# Altium PCB temperture.PcbDoc (part 2 of 2)
Units mil, origin at the board's own origin, x right, y up, seen from the top; angles counter-clockwise.
Board outline 9600 x 6010 mil, 2 copper layers (Top Layer, Bottom Layer); 151 components, 110 nets, 697 pads, 117 vias.
Unrouted connection lines stored in the file: 3.
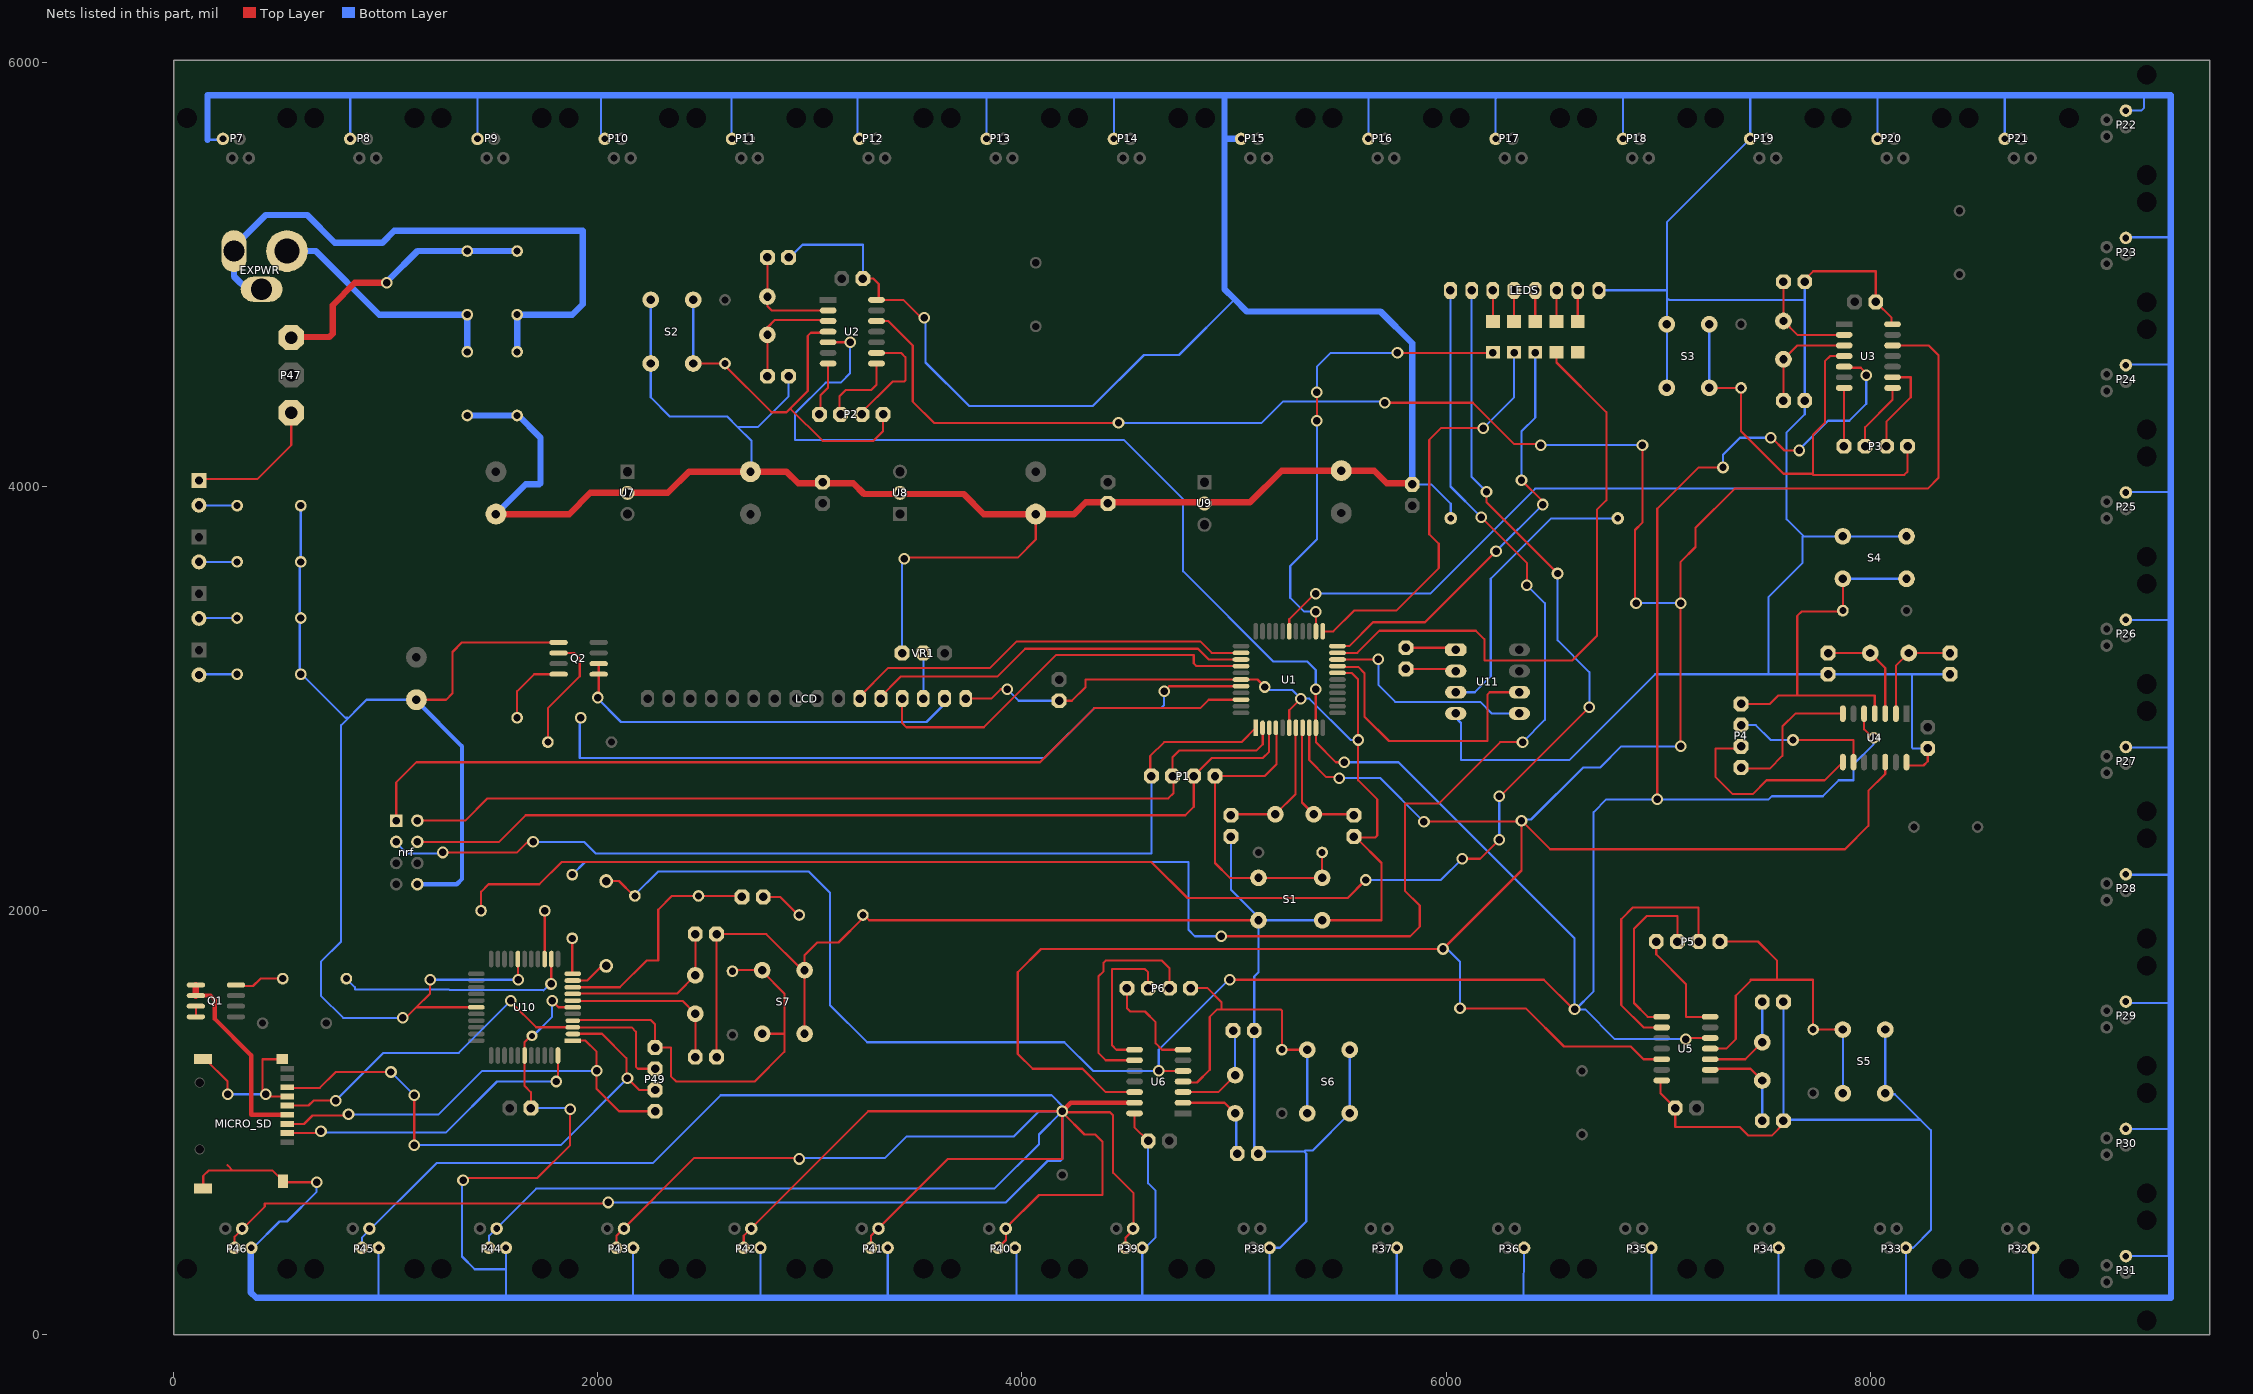
[diagram p2: the nets of this part, all layers, seen from the top]

## Via types
v1: diameter 55, hole 35, Top Layer to Bottom Layer, 116 vias
v2: diameter 50, hole 28, Top Layer to Bottom Layer, 1 vias

## Nets (pads, with @x,y where several pads share a name; then routed paths per layer and width w, separated by ;. In a path a pad name is that pad's centre, name@x,y a point inside that pad or via, vN(x,y) a via of type N, cw(c..) or ccw(c..) an arc to the next point about the centre after c; other vN are vias at no path point) (continued)
DATA5: P39.2 P39.3 P40.2 P40.3 P41.2 P41.3 P42.2 P42.3 P43.2 P43.3 P44.2 P44.3 P45.2 P45.3 P46.2 P46.3 R5.1 U6.13 | length 18916.4
  Top Layer w10: P46.2@288.19,411.06 288.19,463.19 430,605 430,620 v1@2050,620 ; P43.2@2088.19,411.06 2088.19,468.19 2455,835 v1@2925,835 ; P42.2@2688.19,411.06 2688.19,468.19 3275,1055 R5.1@4190,1055 ; P41.2@3288.19,411.06 3288.19,468.19 3650,830 4190,830 4190,1040 R5.1@4185,1045 ; P40.2@3888.19,411.06 3925,447.87 3925,505 4080,660 4380,660 4380,910 4345,945 4295,945 R5.1@4195,1045 ; R5.1@4185,1050 4415,1050 4430,1035 4430,765 4525,670 4525,495 4488.19,458.19 P39.2@4488.19,411.06
  Top Layer w20: R5.1@4190,1055 4230,1095 U6.13@4525,1095
  Bottom Layer w10: P45.2@888.19,411.06 888.19,458.19 1240,810 2260,810 2580,1130 4140,1130 4195,1075 R5.1@4195,1065 ; P44.2@1488.19,411.06 1488.19,468.19 1710,690 3870,690 4080,900 4080,945 R5.1@4190,1055 ; v1@2055,625 3925,625 4120,820 4180,820 4190,830 R5.1@4190,1055 ; v1@2965,835 3355,835 3455,935 3960,935 4080,1055 R5.1@4190,1055
  other v1: 2050,625 2950,830
E: LCD.6 U1.35 | length 1927.7
  Top Layer w10: LCD.6@3235,3010 3370,3145 3850,3145 3975,3270 4840,3270 4894.02,3215.98 U1.35@5032.64,3215.98
GND: battry.2 C1.2 C2.2 C3.2 C4.2 C5.2 C9.2 C10.2 C11.2 C12.2 C13.2 C14.2 C15.2 C16.2 C17.2 C18.2 C19.2 C20.2 C21.2 C22.2 C23.2 C24.2 C25.2 C26.2 C27.2 C28.2 C29.2 C30.2 C31.2 C32.2 DR1.1 DR2.1 LCD.1 LEDS.8 MICRO_SD.6 MICRO_SD.sh1 MICRO_SD.sh2 MICRO_SD.sh3 MICRO_SD.sh4 nrf.8 P7.4 P8.4 P9.4 P10.4 P11.4 P12.4 P13.4 P14.4 P15.4 P16.4 P17.4 P18.4 P19.4 P20.4 P21.4 P22.4 P23.4 P24.4 P25.4 P26.4 P27.4 P28.4 P29.4 P30.4 P31.4 P32.4 P33.4 P34.4 P35.4 P36.4 P37.4 P38.4 P39.4 P40.4 P41.4 P42.4 P43.4 P44.4 P45.4 P46.4 Q2.1 R7.2 R15.1 R16.1 R17.1 R18.1 S1.1 S2.2 S3.2 S4.2 S5.2 S6.1 S7.2 U1.6 U1.18 U1.28 U1.39 U2.14 U3.14 U4.14 U5.14 U6.14 U7.3 U8.3 U9.2 U10.6 U10.18 U10.28 U10.39 U11.4 VR1.1 | length 82982.3
  Top Layer w10: MICRO_SD.sh2@139.06,1300.12 149.88,1300.12 255,1195 v1(255,1135) ; MICRO_SD.sh3@140,695 140,750 165,775 280,775 ; 255,800 280,775 ; MICRO_SD.sh1@513.07,1300.12 420.12,1300.12 420.12,1154.88 450,1125 MICRO_SD.6@535,1125 ; MICRO_SD.sh4@517.01,725.31 467.32,775 280,775 ; MICRO_SD.sh4@520,725 525,720 v1(675,720) ; v1@1095,1495 1145,1545 ; C5.2@1145,2995 1285,2995 1315,3025 1315,3220 1360,3265 Q2.1@1815.51,3265 ; v1(1210,1675) 1210,1610 1145,1545 ; v1@1380,740 1715,740 1870,895 v1(1870,1065) ; U10.28@1427.64,1545 1145,1545 ; U10.18@1623.5,1772.36 1623.5,1691.5 v1@1625,1690 ; C26.2@1685,1065 C26.2@1685,1070 1685,1145 1655,1175 U10.39@1655,1317.64 1655,1380 v2@1685,1410 ; v1@1795,1565 1815,1545 U10.6@1882.36,1545 ; C25.2@2555,1305 C25.2@2560,1310 C24.2@2560,1890 2795,1890 2965,1720 S7.2@2970,1720 ; S7.2@2980,1415 S7.2@2975,1420 S7.2@2975,1720 2975,1790 3035,1850 3135,1850 R7.2@3250,1965 ; R7.2@3250,1985 3280,1955 S1.1@5115,1955 ; C31.2@3250,4980 3300,4980 3325,4955 U2.14@3325,4885 ; U2.14@3314.17,4880 3440,4880 3515,4805 v1@3535,4805 ; v1@3455,3665 3980,3665 4065,3750 C3.2@4065,3870 ; LCD.1@3730,3000 LCD.1@3735,3000 3855,3000 3900,3045 v1(3930,3045) ; C32.2@4175,2990 4235,2990 4300,3055 4300,3090 U1.39@5032.64,3090 5110,3090 v1(5145,3055) ; U6.14@4530,1045 4530,980 C27.2@4595,915 ; U1.6@5260,2862.64 5260,2945 v1(5315,3000) ; U1.28@5260,3317.36 5260,3375 v1@5380,3495 ; S1.1@5415,1955 5695,1955 5695,2225 C13.2@5580,2340 ; U1.18@5487.36,3121.5 5553.5,3121.5 5585,3090 v1(5585,2805) 5585,2620 ; C13.2@5570,2345 5665,2345 5675,2355 5675,2525 5585,2615 ; U5.14@7010,1190 7010,1140 C30.2@7080,1070 7080,980 7385,980 7425,940 7535,940 C20.2@7595,1000 ; C16.2@7685,4970 7730,5015 8025,5015 C28.2@8025,4870 8100,4795 U3.14@8100,4765 ; U4.14@8170,2685 8250,2685 8270,2705 C29.2@8270,2765
  Top Layer w30: C1.2@1520,3870 1865,3870 1965,3970 2330,3970 2430,4070 C2.2@2720,4070 2890,4070 2945,4015 3205,4015 3255,3965 3725,3965 3820,3870 C3.2@4065,3870 4245,3870 4300,3925 5075,3925 5225,4075 C4.2@5505,4075 5660,4075 5720,4015 C9.2@5840,4015
  Bottom Layer w10: 160,5635 P7.4@230,5635 ; v1(255,1135) v1(435,1135) ; P46.4@366.93,411.06 376.06,411.06 500,535 535,535 675,675 v1@675,715 ; R18.1@600,3910 600,3650 595,3645 595,3125 810,2910 820,2910 ; P8.4@833.07,5638.94 833.07,5838.07 835,5840 ; 966.93,175 P45.4@966.93,411.06 ; v1@1065,1495 800,1495 695,1600 695,1760 790,1855 790,2875 910,2995 C5.2@1145,2995 ; v1@1215,1675 v1(1625,1675) ; v1@1360,725 1360,370 1420,310 1566.93,310 ; P9.4@1433.07,5638.94 1433.07,5845 ; P44.4@1566.93,411.06 1566.93,310 ; 1568.86,175 1566.93,176.93 1566.93,310 ; DR2.1@1615,4335 DR2.1@1620,4340 ; C26.2@1685,1070 1865,1070 v1(1870,1065) ; v2@1690,1405 1785,1500 v1(1785,1575) ; 2015,5835 2015,5657.01 P10.4@2033.07,5638.94 ; 2166.93,178.07 P43.4@2166.93,411.06 ; S2.2@2250,4880 S2.2@2250,4580 2250,4420 2340,4330 2610,4330 2660,4280 ; 2630,5840 2630,5642.01 P11.4@2633.07,5638.94 ; C2.2@2725,4070 2725,4215 2660,4280 ; 2766.93,175 2766.93,178.07 ; P42.4@2766.93,411.06 2766.93,178.07 ; 2770,175 2766.93,178.07 ; C15.2@2900,4520 2900,4425 2755,4280 2660,4280 ; C14.2@2905,5080 2965,5140 3250,5140 C31.2@3250,4980 ; 3225,5840 3225,5647.01 P12.4@3233.07,5638.94 ; P41.4@3366.93,411.06 3366.93,178.07 3370,175 ; VR1.1@3435,3215 v1@3435,3660 ; v1@3545,4775 3545,4585 3750,4380 4335,4380 4575,4620 4740,4620 5002.5,4882.5 ; 3830,5845 3833.07,5841.93 P13.4@3833.07,5638.94 ; v1@3935,3040 3985,2990 C32.2@4175,2990 ; P40.4@3965,410 3975,400 3975,175 ; P14.4@4433.07,5638.94 4433.07,5845 ; 4565,175 4566.93,176.93 P39.4@4566.93,411.06 4581.06,411.06 4630,460 4630,680 4595,715 C27.2@4595,915 ; 4950,5850 4955,5845 ; C12.2@4985,2350 4985,2100 S1.1@5120,1965 ; C22.2@5107.5,862.5 5095,875 C23.2@5095,1435 5095,1690 5115,1710 S1.1@5115,1955 S1.1@5415,1955 ; C22.2@5110,865 5330,865 5340,855 5340,535 5216.06,411.06 P38.4@5166.93,411.06 5166.93,176.93 5165,175 ; v1(5145,3055) 5160,3040 5275,3040 v1(5315,3000) 5355,3000 5550,2805 v1(5585,2805) ; 5335,870 5370,870 S6.1@5545,1045 ; v1@5390,3495 5925,3495 6420,3990 7605,3990 ; S6.1@5540,1050 5545,1055 S6.1@5545,1345 ; P16.4@5633.07,5638.94 5633.07,5828.07 5650,5845 ; 5765,175 5766.93,176.93 P37.4@5766.93,411.06 ; C9.2@5845,4010 5930,4010 6021.3,3918.7 battry.2@6021.3,3850 ; U11.4@6040,2915 6070,2885 6070,2710 6580,2710 6985,3115 7520,3115 ; P17.4@6233.07,5638.94 6233.07,5828.07 6245,5840 ; 6365,175 P36.4@6366.93,411.06 ; LEDS.8@6720,4925 7040,4925 ; P18.4@6833.07,5638.94 6833.07,5833.07 6845,5845 ; 6965,175 6966.93,176.93 P35.4@6966.93,411.06 ; S3.2@7035,4455 7040,4460 S3.2@7040,4465 S3.2@7040,4765 7040,4890 ; 7435,5855 7433.07,5853.07 7433.07,5845 P19.4@7433.07,5638.94 7040,5245.87 7040,4925 ; 7565,175 7566.93,176.93 P34.4@7566.93,411.06 ; C20.2@7590,1015 C21.2@7590,1570 ; C20.2@7597.5,1017.5 7600,1015 8235,1015 ; 7680,3765 7680,3640 7520,3480 7520,3115 ; C16.2@7690,4965 7690,4880 ; 8015,5850 8020,5845 8033.07,5831.93 P20.4@8033.07,5638.94 ; S5.2@8070,1440 S5.2@8070,1140 8075,1135 8115,1135 8235,1015 ; S4.2@8160,3770 8155,3765 S4.2@7870,3765 7685,3765 7605,3845 7605,3990 ; 8165,175 8166.93,176.93 P33.4@8166.93,411.06 8201.06,411.06 8285,495 8285,965 8235,1015 ; C29.2@8270,2765 8200,2765 8195,2770 8195,3115 ; C18.2@8375,3105 C18.2@8385,3095 ; C18.2@8375,3115 8195,3115 ; P21.4@8633.07,5638.94 8633.07,5845 8633.07,5848.07 8635,5850 ; P32.4@8765,405 8766.93,403.07 8766.93,175 ; P27.4@9200,2770 9415,2770 ; P31.4@9203.94,371.93 9416.93,371.93 ; P30.4@9203.94,971.93 9415,971.93 ; P23.4@9203.94,5171.93 9207.01,5175 9415,5175 ; P22.4@9203.94,5771.93 9276.93,5771.93 9290,5785 9290,5845 ; P26.4@9205,3375 9210,3370 9415,3370 ; P24.4@9205,4570 9210,4575 9415,4575 ; P29.4@9210,1575 9220,1565 9415,1565 ; P25.4@9210,3975 9411.14,3975 ; P28.4@9215,2170 9415,2170 ; 7040,4890 7040,4925 ; 7040,4890 7050,4880 7690,4880 ; 7520,3115 C19.2@7800,3115 8195,3115 ; 7605,3990 7605,4255 7690,4340 C17.2@7690,4405 7690,4880
  Bottom Layer w20: C5.2@1145,2990 1360,2775 1360,2150 1335,2125 nrf.8@1150,2125
  Bottom Layer w30: 160,5635 160,5845 1433.07,5845 3830,5845 4433.07,5845 4955,5845 ; P46.4@365,410 365,200 390,175 966.93,175 1568.86,175 2766.93,175 ; DR1.1@1385,4335 DR2.1@1615,4335 ; C1.2@1520,3870 1660,4010 1725,4010 ; DR2.1@1620,4340 1730,4230 1730,4015 ; 2770,175 3370,175 3975,175 4565,175 5165,175 5765,175 6365,175 6965,175 7565,175 8165,175 8766.93,175 9416.93,175 9416.93,371.93 ; P15.4@5030,5640 4955,5640 ; C9.2@5840,4010 5840,4675 5690,4825 5060,4825 5002.5,4882.5 4955,4930 4955,5640 ; 8015,5845 7433.07,5845 5650,5845 4955,5845 ; 8020,5845 8633.07,5845 9290,5845 9415,5845 9415,5175 9415,4575 ; 9415,375 9415,971.93 9415,1565 9415,2170 9415,2770 9415,3370 9415,4571.93 ; 4955,5640 4955,5845
  other v1: 1365,730 1080,1495 5385,3495 3445,3660 3540,4795
  other v2: 1690,1410
IN1: DR1.2 DR4.1 EXPWR.1 | length 1161.3
  Bottom Layer w10: DR1.2@1380,4645 DR1.2@1385,4650
  Bottom Layer w30: EXPWR.1@515,5110 670,5110 970,4810 DR4.1@1385,4810 DR1.2@1385,4650
IN2: DR2.2 DR3.1 EXPWR.2 EXPWR.3 | length 2909.3
  Bottom Layer w10: EXPWR.2@285,5060 EXPWR.2@285,5110 ; EXPWR.2@290,5130 EXPWR.2@290,5135 ; EXPWR.3@350,4925 EXPWR.3@415,4925
  Bottom Layer w30: EXPWR.2@285,5060 285,4990 EXPWR.3@350,4925 ; EXPWR.2@290,5135 435,5280 630,5280 760,5150 985,5150 1040,5205 1930,5205 1930,4860 1880,4810 DR3.1@1620,4810 DR2.2@1620,4635
IRQ_S: nrf.1 U1.42 | length 4311.5
  Top Layer w10: nrf.1@1050,2425 1050,2605 1145,2700 4085,2700 4340,2955 4840,2955 4880,2995 U1.42@5020,2995
LCD_POW: R581.1 U1.40 | length 3490.1
  Top Layer w10: v1(4670,3035) 4693.5,3058.5 U1.40@5032.64,3058.5
  Bottom Layer w10: R581.1@1925,2910 1915,2900 1915,2720 4105,2720 4340,2955 4655,2955 4670,2970 v1(4670,3035)
LD_1: R50.1 U10.11 | length 167.1
  Top Layer w10: R50.1@1880,1870 1880,1710 U10.11@1885,1705
LD_2: R51.1 U10.14 | length 215
  Top Layer w10: U10.14@1750,1785 R51.1@1750,2000
LD_3: R513.1 U1.21 | length 2878.4
  Top Layer w10: U1.21@5487.36,3215.98 5580.98,3215.98 5685,3320 6140,3320 6180,3280 6180,3185 ; 6180,3180 6595,3180 6710,3295 6710,3890 6755,3935 6755,4350 6520,4585 R513.1@6520,4632.5
LD_4: R512.1 U1.22 | length 2030.4
  Top Layer w10: U1.22@5487.36,3247.48 5542.48,3247.48 5655,3360 5900,3360 v1(6235,3695) ; v1(6355,4030) 6455,3930 v1(6455,3915)
  Bottom Layer w10: v1(6235,3695) 6450,3910 v1@6450,3915 ; v1(6355,4030) 6355,4260 6420,4325 v1@6420,4635
  other v1: 6420,4630
LD_5: R511.1 U1.23 | length 1980.2
  Top Layer w10: U1.23@5417.48,3317.36 5467.36,3317.36 5565,3415 5765,3415 5965,3615 5965,3730 5920,3775 5920,4220 5975,4275 v1(6175,4275)
  Bottom Layer w10: v1@6180,4280 6320,4420 v1(6320,4630)
LD_6: R510.1 U1.24 | length 2218.7
  Top Layer w10: v1@5385,3400 5385.98,3399.02 U1.24@5385.98,3317.36 ; v1(5390,4310) v1(5390,4445) ; v1(5770,4630) R510.1@6210,4630
  Bottom Layer w10: v1(5385,3410) 5330,3410 5265,3475 5265,3625 5390,3750 v1(5390,4310) ; v1(5390,4445) 5390,4565 5455,4630 v1(5770,4630)
  other v1: 6220,4630
LD_7: R514.1
LP: LCD.2 Q2.5 Q2.6 | length 1920.3
  Top Layer w10: v1(2000,3005) 2004.49,3009.49 Q2.5@2004.49,3115 Q2.6@2004.49,3164.49 ; v1@2002.5,3002.5 v1@2004.49,3004.49 ; Q2.6@2004.49,3165 Q2.6@2004.49,3164.49 ; Q2.6@2005,3165 Q2.6@2004.49,3164.49
  Bottom Layer w10: v1@1990,3010 2110,2890 3550,2890 3635,2975 LCD.2@3635,3000
MISO1: nrf.2 P1.2 U1.2 | length 4293.7
  Top Layer w10: nrf.2@1150,2425 1375,2425 1480,2530 4690,2530 4715,2555 P1.2@4715,2635 ; P1.2@4710,2635 4710,2725 4740,2755 5105,2755 5135,2785 U1.2@5135,2840
MISO2: P2.2 U2.8 | length 372.4
  Top Layer w10: P2.2@3140,4350 3140,4425 3170,4455 3290,4455 3314.17,4479.17 U2.8@3314.17,4580
MISO3: P3.2 U3.8 | length 328.5
  Top Layer w10: P3.2@7975,4190 7975,4280 8104.17,4409.17 U3.8@8104.17,4465
MISO4: P4.2 U4.8 | length 944.8
  Top Layer w10: P4.2@7380,2775 7370,2765 7270,2765 7270,2630 7350,2550 7445,2550 7510,2615 7784.17,2615 U4.8@7870,2700.83
MISO5: P5.2 U5.8 | length 861.8
  Top Layer w10: U5.8@7020,1500 U5.8@7015.83,1500 6950,1500 6885,1565 6885,1915 6945,1975 7090,1975 P5.2@7090,1855
MISO6: P6.2 U6.8 | length 724.5
  Top Layer w10: U6.8@4530,1345 4445,1345 4425,1365 4425,1725 4580,1725 4595,1710 P6.2@4595,1635
MISO7: MICRO_SD.7 P49.2 U10.2 | length 2546.3
  Top Layer w10: MICRO_SD.7@535,1165 690,1165 765,1240 v1(1025,1240) ; v1(1135,895) v1(1135,1130) ; U10.2@1885,1420 2020,1420 2135,1305 v1@2135,1215 ; v1(2140,1210) 2195,1155 P49.2@2270,1155
  Bottom Layer w10: v1@1040,1225 v1(1135,1130) ; v1@1155,895 1825,895 v1(2140,1210)
MOSI1: nrf.3 P1.1 U1.1 | length 4601.7
  Top Layer w10: v1(1270,2275) 1620,2275 1670,2325 v1(1695,2325) ; P1.1@4605,2640 4605,2730 4670,2795 5034.88,2795 U1.1@5102.52,2862.64
  Bottom Layer w10: nrf.3@1050,2325 1050,2320 1100,2270 v1@1250,2270 ; v1@1710,2325 1935,2325 1990,2270 4610,2270 P1.1@4610,2635
MOSI2: P2.1 U2.7 | length 249.8
  Top Layer w10: P2.1@3050,4345 3050,4430 3085.83,4465.83 U2.7@3085.83,4580
MOSI3: P3.1 U3.7 | length 280.3
  Top Layer w10: P3.1@7875,4185 P3.1@7875,4190 7875,4464.17 U3.7@7875.83,4465
MOSI4: P4.1 U4.7 | length 663.4
  Top Layer w10: P4.1@7395,2670 7525,2670 7585,2730 7585,2868.35 7645.83,2929.17 U4.7@7870,2929.17
MOSI5: P5.1 U5.7 | length 522.2
  Top Layer w10: P5.1@6990,1850 6990,1795 7130,1655 7130,1500 U5.7@7244.17,1500
MOSI6: P6.1 U6.7 | length 488.5
  Top Layer w10: P6.1@4495,1625 4495,1540 4510,1525 4580,1525 4630,1475 4630,1375 4660,1345 U6.7@4759.17,1345
MOSI7: MICRO_SD.3 P49.1 U10.1 | length 2182.7
  Top Layer w10: MICRO_SD.3@536.69,995 615,995 655,1035 v1@810,1035 ; U10.1@1882.36,1387.52 1942.48,1387.52 1995,1335 v1(1995,1245) 1995,1160 2100,1055 P49.1@2270,1055 P49.1@2275,1055
  Bottom Layer w10: v1(825,1040) 1250,1040 1455,1245 v1(1995,1245) v1@2000,1245
NCS: MICRO_SD.2 U10.44 | length 1464.2
  Top Layer w10: MICRO_SD.2@536.69,951.69 681.69,951.69 v1@685,955 ; v1@1812.48,1212.52 U10.44@1812.48,1317.64
  Bottom Layer w10: v1@695,955 1285,955 1525,1195 v1(1805,1195)
  other v1: 695,960
NetC12_1: C12.1 U1.7 Y1.2 | length 641.3
  Top Layer w10: C12.1@4985,2450 4990,2455 Y1.2@5194.72,2455 5290,2550.28 U1.7@5290,2845
NetC13_1: C13.1 U1.8 Y1.1 | length 626.8
  Top Layer w10: U1.8@5320,2860 5320,2510.28 Y1.1@5375.28,2455 C13.1@5555,2455 ; C13.1@5560,2460 C13.1@5555,2455 ; C13.1@5565,2460 5560,2455 C13.1@5555,2455
NetC14_1: C14.1 U2.2 Y2.2 | length 520.4
  Top Layer w10: Y2.2@2800,4890 2800,4850 2820,4830 U2.2@3080,4830 ; C14.1@2800,5080 2800,4910 2805,4905 Y2.2@2805,4890
NetC15_1: C15.1 U2.3 Y2.1 | length 531.6
  Top Layer w10: C15.1@2800,4520 2800,4710 Y2.1@2805,4715 ; Y2.1@2800,4715 2800,4750 2835,4785 U2.3@3085,4785
NetC16_1: C16.1 U3.2 Y3.2 | length 494.1
  Top Layer w10: Y3.2@7585,4785 7590,4790 C16.1@7590,4965 ; Y3.2@7590,4780.28 7655.28,4715 U3.2@7875,4715
NetC17_1: C17.1 U3.3 Y3.1 | length 507
  Top Layer w10: C17.1@7590,4405 Y3.1@7590,4595 ; Y3.1@7590,4599.72 7655.28,4665 U3.3@7875.83,4665 U3.3@7880,4665
NetC18_1: C18.1 U4.2 Y4.2 | length 498.3
  Top Layer w10: U4.2@8120,2935 8120,3154.72 Y4.2@8177.64,3212.36 ; Y4.2@8180,3210 8185,3215 C18.1@8375,3215
NetC19_1: C19.1 U4.3 Y4.1 | length 516.2
  Top Layer w10: C19.1@7800,3215 Y4.1@7999.72,3215 ; Y4.1@7995,3210 8000,3215 Y4.1@7999.72,3215 ; U4.3@8070,2935 8070,3144.72 7999.86,3214.86 Y4.1@7999.72,3215
NetC20_1: C20.1 U5.2 Y5.2 | length 446.2
  Top Layer w10: U5.2@7260,1255 7434.72,1255 Y5.2@7490,1199.72 ; C20.1@7487.5,1012.5 C20.1@7490,1015
  Bottom Layer w10: C20.1@7490,1010 Y5.2@7490,1199.72
NetC21_1: C21.1 U5.3 Y5.1 | length 463.7
  Top Layer w10: U5.3@7255,1300 7409.72,1300 Y5.1@7487.36,1377.64 ; Y5.1@7485,1380 Y5.1@7490,1385
  Bottom Layer w10: C21.1@7490,1570 7490,1385 Y5.1@7495,1380
NetC22_1: C22.1 U6.2 Y6.2 | length 449.7
  Top Layer w10: U6.2@4770,1095 4954.72,1095 Y6.2@5005,1044.72 ; C22.1@5005,860 C22.1@5010,855
  Bottom Layer w10: Y6.2@5005,1044.72 5010,1039.72 C22.1@5010,860
NetC23_1: C23.1 U6.3 Y6.1 | length 496.3
  Top Layer w10: U6.3@4760,1145 4924.72,1145 Y6.1@5005,1225.28 ; C23.1@5000,1430 C23.1@5005,1425
  Bottom Layer w10: C23.1@4990,1430 5005,1415 Y6.1@5005,1225.28
NetC24_1: C24.1 U10.8 Y8.1 | length 800
  Top Layer w10: U10.8@1890,1610 2374.72,1610 Y8.1@2460,1695.28 C24.1@2460,1890
NetC25_1: C25.1 U10.7 Y8.2 | length 793.8
  Top Layer w10: U10.7@1895,1580 1900,1575 2399.72,1575 Y8.2@2460,1514.72 2460,1320 C25.1@2465,1315
NetD1_2: D1.2 R15.2 | length 180
  Bottom Layer w10: D1.2@120,3645 R15.2@300,3645
NetD2_2: D2.2 R16.2 | length 170
  Bottom Layer w10: D2.2@130,3380 R16.2@300,3380
NetD3_2: D3.2 R17.2 | length 177.1
  Bottom Layer w10: D3.2@125,3110 130,3115 R17.2@300,3115
NetD4_2: D4.2 R18.2 | length 180
  Bottom Layer w10: D4.2@120,3910 R18.2@300,3910
NetD5_1: D5.1 U10.10 | length 179.2
  Top Layer w10: U10.10@1882.36,1670.98 1950.98,1670.98 2015,1735 D5.1@2035,1735
NetDR3_2: DR3.2 DR4.2 P47.1 | length 1302.7
  Top Layer w10: v1(1005,4960) 1005,4955 v1@1010,4960
  Top Layer w30: P47.1@565,4705 735,4705 750,4720 750,4855 855,4960 v1@1010,4960
  Bottom Layer w30: v1@1015,4975 1150,5110 DR4.2@1385,5110 DR3.2@1620,5110
NetLCD_3: LCD.3 VR1.2 | length 215
  Bottom Layer w10: LCD.3@3535,3000 VR1.2@3535,3215
NetLEDS_1: LEDS.1 R50.2 | length 8002.9
  Top Layer w10: v1(4940,1880) 5830,1880 5875,1925 5875,2025 5805,2095 5805,2505 5965,2505 6255,2795 v1(6360,2795) ; v1(6165,3855) 6380,3640 v1@6380,3545
  Bottom Layer w10: R50.2@1880,2170 1940,2230 4785,2230 4785,1910 4815,1880 v1(4940,1880) ; LEDS.1@6020,4925 6020,4000 v1(6165,3855) ; v1(6360,2795) 6465,2900 6465,3450 v1(6380,3535)
NetLEDS_2: LEDS.2 R51.2 | length 8124.1
  Top Layer w10: R51.2@1450,2000 1450,2090 1485,2125 1725,2125 1830,2230 4610,2230 4780,2060 5535,2060 v1@5615,2140 ; v1(6075,2245) 6160,2245 v1(6250,2335) ; v1(6190,3975) 6190,3925 v1(6525,3590) ; v1(6250,2540) 6255,2540 v1(6675,2960)
  Bottom Layer w10: v1(5620,2145) 5975,2145 v1(6075,2245) ; LEDS.2@6120,4925 6120,4045 v1(6190,3975) ; v1(6250,2335) v1(6250,2540) ; v1(6525,3590) 6525,3275 6675,3125 v1(6675,2960)
NetLEDS_3: LEDS.3 R510.2 | length 150
  Top Layer w10: R510.2@6220,4775 R510.2@6220,4777.5 LEDS.3@6220,4925
NetLEDS_4: LEDS.4 R511.2 | length 145
  Top Layer w10: R511.2@6320,4780 LEDS.4@6320,4925
NetLEDS_5: LEDS.5 R512.2 | length 147.1
  Top Layer w10: R512.2@6415,4780 6420,4785 LEDS.5@6420,4925
NetLEDS_6: LEDS.6 R513.2 | length 140
  Top Layer w10: R513.2@6520,4785 LEDS.6@6520,4925
NetLEDS_7: LEDS.7 R514.2 | length 147.1
  Top Layer w10: R514.2@6615,4780 6620,4785 LEDS.7@6620,4925
NetQ1_4: Q1.4 R58.2 | length 229.5
  Top Layer w10: Q1.4@300,1645 375,1645 410,1680 R58.2@515,1680
NetQ1_7: Q1.7 Q1.8 | length 50.2
  Top Layer w10: Q1.8@105,1500 105.51,1500.51 Q1.7@105.51,1550
NetQ2_2: Q2.2 R580.2 | length 577.5
  Top Layer w10: R580.2@1765,2785 1765,2955 1915,3105 1915,3190 1890,3215 Q2.2@1815.51,3215 Q2.2@1815,3215
NetQ2_4: Q2.4 R581.2 | length 348.1
  Top Layer w10: R581.2@1620,2910 1620,3035 1700,3115 Q2.4@1810,3115
NetR7_1: R7.1 W5.1 | length 193.1
  Top Layer w10: W5.1@2780,2065 2860,2065 R7.1@2940,1985
NetU11_1: U11.1 Y7.1 | length 244.1
  Top Layer w10: Y7.1@5810,3240 6040,3240 U11.1@6050,3230
NetU11_2: U11.2 Y7.2 | length 247.1
  Top Layer w10: Y7.2@5810,3140 6050,3140 U11.2@6055,3135
RS: LCD.4 U1.37 | length 1901.2
  Top Layer w10: LCD.4@3435,2995 3435,2885 3455,2865 3820,2865 4160,3205 4810,3205 4810,3165.98 4822.99,3152.99 U1.37@5032.64,3152.99
RST1: P1.4 R14.2 S1.2 U1.4 | length 1538.8
  Top Layer w10: P1.4@4910,2630 4910,2225 4980,2155 S1.2@5115,2155 S1.2@5415,2155 5415,2270 R14.2@5420,2275 ; P1.4@4910,2635 5145,2635 5200,2690 U1.4@5200,2855
RST2: P2.4 R13.1 S2.1 U2.4 | length 1945.7
  Top Layer w10: S2.1@2450,4580 2590,4580 2820,4350 2890,4350 2990,4450 2990,4710 3005,4725 U2.4@3095,4725 ; 2910,4365 3060,4215 3300,4215 3345,4260 P2.4@3345,4340
  Bottom Layer w10: S2.1@2445,4580 2450,4585 S2.1@2450,4880
RST3: P3.4 R12.1 S3.1 U3.4 | length 2297.2
  Top Layer w10: S3.1@7240,4465 R12.1@7390,4465 7390,4260 7590,4060 7725,4060 ; U3.4@7870,4615 7810,4615 7785,4590 7785,4300 7730,4245 7730,4055 8160,4055 8175,4070 P3.4@8175,4190
  Bottom Layer w10: S3.1@7240,4465 S3.1@7240,4765
RST4: P4.4 R11.1 S4.1 U4.4 | length 1786.9
  Top Layer w10: P4.4@7390,2975 7525,2975 7565,3015 8020,3015 U4.4@8020,2929.17 ; 7655,3020 7655,3390 7675,3410 7865,3410 R11.1@7870,3415 S4.1@7870,3565
  Bottom Layer w10: S4.1@7865,3555 7875,3565 S4.1@8170,3565
RST5: P5.4 R10.1 S5.1 U5.4 | length 1812
  Top Layer w10: U5.4@7244.17,1350 7320,1350 7365,1395 7365,1600 7440,1675 ; P5.4@7290,1855 7470,1855 7560,1765 7560,1675 ; 7435,1675 7440,1675 ; S5.1@7870,1440 7735,1440 7730,1445 7730,1675 7560,1675 ; 7440,1675 7560,1675
  Bottom Layer w10: S5.1@7870,1440 7870,1150 S5.1@7875,1145
RST6: P6.4 R9.1 S6.2 U6.4 | length 1563.3
  Top Layer w10: U6.4@4760,1190 4825,1190 4885,1250 4885,1500 4920,1535 4940,1535 ; P6.4@4795,1635 4875,1635 4940,1570 4940,1535 ; S6.2@5345,1345 R9.1@5225,1345 5225,1530 5220,1535 4940,1535
  Bottom Layer w10: S6.2@5345,1050 S6.2@5345,1345
RST7: P49.4 R8.2 S7.1 U10.4 | length 1985.1
  Top Layer w10: U10.4@1885,1485 2250,1485 2270,1465 P49.4@2270,1355 2345,1355 2345,1220 2370,1195 2740,1195 2880,1335 2880,1610 S7.1@2775,1715 ; R8.2@2635,1720 S7.1@2775,1720 ; S7.1@2775,1420 2880,1420
RW: LCD.5 U1.36 | length 1825.9
  Top Layer w10: LCD.5@3325,3000 3430,3105 3885,3105 4015,3235 4830,3235 4880.51,3184.49 U1.36@5032.64,3184.49
RX: D5.2 R6.1 U1.10 U2.5 U3.5 U4.5 U5.5 U6.5 | length 17979.7
  Top Layer w10: D5.2@2040,2140 2100,2140 R6.1@2170,2070 ; U2.5@3085.83,4680 v1@3185,4680 ; v1@4655,1245 U6.5@4759.17,1245 ; v1(4980,1675) 6460,1675 v1@6600,1535 ; v1(5385,3045) 5385,2870 U1.10@5390,2865 ; U1.10@5385.98,2862.64 5385.98,2794.02 5480,2700 v1@5505,2700 ; v1@6995,2530 6995,3895 7190,4090 v1(7305,4090) ; v1@7140,1400 U5.5@7244.17,1400 ; v1@7535,4230 7595,4170 v1(7665,4170) ; U3.5@7875.83,4565 7880.83,4560 7955,4560 v1@7980,4535 ; U4.5@7970,2929.17 7970,2855 v1@8010,2815
  Bottom Layer w10: R6.1@2175,2075 2285,2185 2995,2185 3095,2085 3095,1555 3270,1380 4200,1380 4335,1245 v1(4645,1245) 4645,1345 v1@4975,1675 ; v1(3190,4680) 3190,4535 3145,4490 3075,4490 2930,4345 2930,4220 4480,4220 4760,3940 4760,3600 5185,3175 5345,3175 5385,3135 v1(5385,3045) ; v1@4977.5,1677.5 v1@4980,1680 ; v1(5520,2700) 5775,2700 6605,1870 v1(6605,1535) ; v1@6605,1530 6695,1620 6695,2465 6755,2525 7520,2525 7535,2540 7775,2540 7850,2615 7920,2615 7920,2690 8015,2785 v1(8015,2815) ; v1@6620,1535 6655,1535 6795,1395 v1(7130,1395) ; v1(7305,4090) 7305,4150 7385,4230 v1(7530,4230) ; v1@7670,4180 7800,4310 7900,4310 7980,4390 v1(7980,4525)
  other v1: 6995,2525
RX1: R6.2 U10.9 W5.2 | length 1103.6
  Top Layer w10: U10.9@1882.36,1639.49 2104.49,1639.49 2230,1765 2285,1765 2285,2005 2350,2070 R6.2@2475,2070 2660,2070 W5.2@2665,2065
SCK1: nrf.4 P1.3 U1.3 | length 4371
  Top Layer w10: nrf.4@1150,2325 1535,2325 1660,2450 4770,2450 4810,2490 P1.3@4810,2625 ; P1.3@4810,2635 4895,2720 5135,2720 5165,2750 U1.3@5165,2855
SCK2: P2.3 U2.9 | length 528.3
  Top Layer w10: P2.3@3240,4345 3390,4495 3445,4495 3450,4500 3450,4610 3430,4630 U2.9@3314.17,4630
SCK3: P3.3 U3.9 | length 458.5
  Top Layer w10: P3.3@8075,4190 8075,4305 8190,4420 8190,4515 U3.9@8104.17,4515
SCK4: P4.3 U4.9 | length 628.2
  Top Layer w10: v1@7650,2805 7920,2805 U4.9@7920,2700.83
  Bottom Layer w10: P4.3@7390,2875 7460,2875 7530,2805 v1@7615,2805
  other v1: 7635,2805
SCK5: P5.3 U5.9 | length 1191.3
  Top Layer w10: U5.9@7020,1450 U5.9@7015.83,1450 6930,1450 6825,1555 6825,1960 6880,2015 7190,2015 P5.3@7190,1855
SCK6: P6.3 U6.9 | length 1044.3
  Top Layer w10: U6.9@4530.83,1295 4395,1295 4360,1330 4360,1690 4385,1715 4385,1755 4395,1765 4660,1765 4695,1730 P6.3@4695,1635
SCK7: MICRO_SD.5 P49.3 U10.3 | length 2147.8
  Top Layer w10: MICRO_SD.5@536.69,1081.61 636.61,1081.61 660,1105 v1(765,1105) ; v1@1595,1565 1709.49,1450.51 U10.3@1882.36,1450.51 ; U10.3@1895,1450 2160,1450 2180,1430 2180,1265 2190,1255 P49.3@2270,1255
  Bottom Layer w10: v1@760,1110 770,1110 990,1330 1345,1330 v1(1590,1575)
SCL: U1.19 U11.6 | length 1324.2
  Top Layer w10: U1.19@5510,3150 5585,3150 5615,3120 5615,2915 5730,2800 6195,2800 6195,3020 6205,3030 U11.6@6345,3030
SD_POWER: R58.1 U10.13 | length 1114.3
  Top Layer w10: v1@1780,1672.5 1780.98,1673.48 U10.13@1780.98,1772.36
  Bottom Layer w10: R58.1@815,1680 855,1640 855,1630 ; 855,1629.92 1745,1625 1775,1655 v1(1780,1655) ; v1@1780,1655.06 v1@1790,1655
SDA: U1.20 U11.5 | length 1038
  Top Layer w10: U1.20@5485,3185 v1(5680,3185)
  Bottom Layer w10: v1@5685,3185 5680,3180 5680,3065 5760,2985 6160,2985 6215,2930 U11.5@6345,2930
SW1: 
SW2: D4.1 P47.3 | length 649.1
  Top Layer w10: D4.1@125,4035 395,4035 555,4195 P47.3@555,4347.83
TX: U1.9 U2.12 U3.12 U4.12 U5.12 U6.12 | length 17558
  Top Layer w10: U2.12@3314.17,4780 3370,4780 3485,4665 3485,4400 3585,4300 v1(4455,4300) ; U6.12@4530.83,1145 4395,1145 4285,1255 4050,1255 3980,1325 3980,1710 4090,1820 v1(5985,1820) 6355,2190 v1@6355,2420 ; U1.9@5354.49,2862.64 5354.49,2710.51 5435,2630 v1@5490,2630 ; v1(5710,4395) 6125,4395 6320,4200 v1@6440,4200 ; v1(5895,2420) 6345,2420 v1@6355,2430 ; v1(6065,1540) 6375,1540 6555,1360 6870,1360 6930,1300 U5.12@7015.83,1300 ; v1@6360,2420 6490,2290 7880,2290 7990,2400 7990,2565 8070,2645 U4.12@8070,2700.83 ; v1@6890,3455 6890,3795 6925,3830 v1(6925,4195) ; v1@7110,2775 7105,2780 v1(7105,3450) 7105,3645 7175,3715 7175,3805 7360,3990 8270,3990 8320,4040 8320,4620 8275,4665 U3.12@8104.17,4665
  Bottom Layer w10: v1(4455,4300) 5130,4300 5230,4400 v1@5690,4400 ; v1(5495,2625) 5690,2625 5890,2425 v1@5895,2425 ; v1(5985,1820) 6005,1820 6065,1760 v1(6065,1540) ; v1@6355,2430 6400,2430 6645,2675 6725,2675 6825,2775 v1(7105,2775) ; v1(6445,4195) v1(6925,4195) ; v1(6895,3450) v1(7105,3450)
  other v1: 6355,2425
VBAT: battry.1 U11.3 | length 1372.8
  Bottom Layer w10: U11.3@6045,3030 6135,3030 6210,3105 6210,3565 6495,3850 battry.1@6808.7,3850
VDD: MICRO_SD.4 Q1.5 Q1.6 | length 930.8
  Top Layer w10: Q1.5@105,1649.49 Q1.5@105.51,1650
  Top Layer w20: Q1.6@105.51,1600 175,1600 195,1580 195,1490 366.69,1318.31 366.69,1038.31 MICRO_SD.4@536.69,1038.31
  Top Layer w30: Q1.6@105,1600 Q1.5@105,1649.49
pads on no net: LCD.7 LCD.8 LCD.9 LCD.10 MICRO_SD.0 P7.shild P8.shild P9.shild P10.shild P11.shild P12.shild P13.shild P14.shild P15.shild P16.shild P17.shild P18.shild P19.shild P20.shild P21.shild P22.shild P23.shild P24.shild P25.shild P26.shild P27.shild P28.shild P29.shild P30.shild P31.shild P32.shild P33.shild P34.shild P35.shild P36.shild P37.shild P38.shild P39.shild P40.shild P41.shild P42.shild P43.shild P44.shild P45.shild P46.shild Q1.1 Q1.2 U1.11 U1.12 U1.13 U1.14 U1.15 U1.16 U1.25 U1.26 U1.29 U1.34 U2.6 U2.10 U2.11 U3.6 U3.10 U3.11 U4.6 U4.10 U4.11 U5.6 U5.10 U5.11 U6.6 U6.10 U6.11 U10.12 U10.19 U10.20 U10.21 U10.22 U10.23 U10.24 U10.25 U10.26 U10.29 U10.30 U10.31 U10.32 U10.33 U10.34 U10.35 U10.36 U10.37 U10.40 U10.41 U10.43 U11.7
copper on no net: | length 7.1
  Bottom Layer w10: 5030,5645 5035,5640

## Text inside footprints (layer, text, board x,y; h text height)
nrf: Top Overlay "2" at 1130,2525 h50 r270; Top Overlay "1" at 1030,2505 h50 r270; Top Overlay "7" at 1030,2065 h50 r270; Top Overlay "8" at 1130,2065 h50 r270
U7: Top Overlay "1" at 1995.31,4079.84 h59.06 r270; Top Overlay "2" at 1995.32,3889.68 h59.06 r270; Top Overlay "3" at 1995.32,3989.69 h59.06 r270
U8: Top Overlay "1" at 3569.69,3860.16 h59.06 r90; Top Overlay "2" at 3569.68,4050.32 h59.06 r90; Top Overlay "3" at 3569.68,3950.31 h59.06 r90
U9: Top Overlay "3" at 4709.41,3839.68 h59.06 r270; Top Overlay "2" at 4709.41,3939.69 h59.06 r270; Top Overlay "1" at 4709.41,4029.84 h59.06 r270